# Altium PCB PCB2.PcbDoc
Units mil, origin at the board's own origin, x right, y up, seen from the top; angles counter-clockwise.
Board outline 6000 x 4000 mil, 2 copper layers (Top Layer, Bottom Layer); 96 components, 54 nets, 257 pads, 0 vias.
Unrouted connection lines stored in the file: 193.
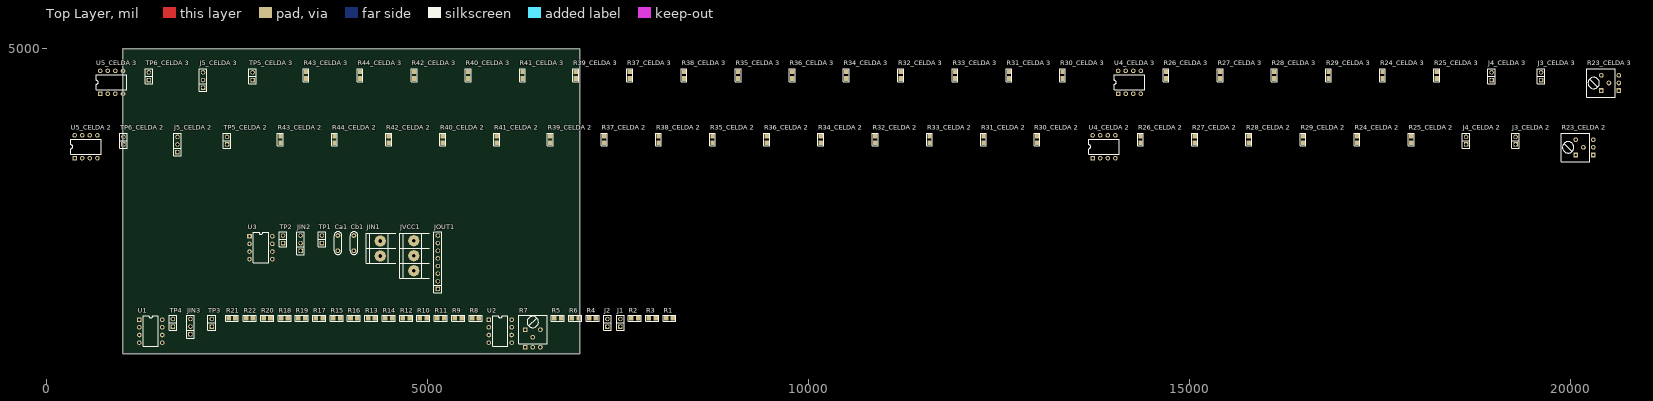
[diagram p0: Top Layer view]
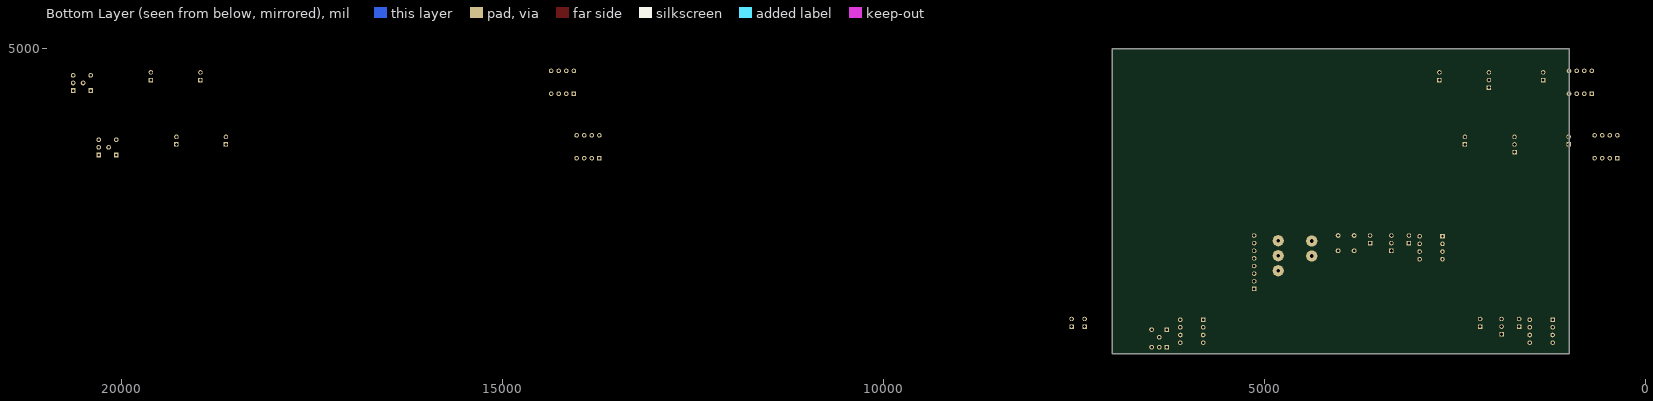
[diagram p1: Bottom Layer view, seen from below]

## Layer stack, top to bottom
Top Solder: solder mask 0.4, Solder Resist, Dk 3.5
Top Layer: signal copper 1.4
Dielectric 1: dielectric 12.6, FR-4, Dk 4.8
Bottom Layer: signal copper 1.4
Bottom Solder: solder mask 0.4, Solder Resist, Dk 3.5

## Board outline
1000,1000 7000,1000 7000,5000 1000,5000

## Design rules (kind name [scope] priority, off if disabled: settings)
Clearance [All] p1: gap=10 ignorepadtopadclearanceinfootprint=FALSE except(0: Arc-Hole Track-Hole SMDPad-Hole THPad-Hole Via-Hole Fill-Hole Poly-Hole Region-Hole Text-Hole)
PolygonConnect [All] p1: connectstyle=Relief reliefconductorwidth=10 reliefentries=4 polygonreliefangle="90 Angle" airgapwidth=10
RoomDefinition filter [InComponentClass('filter')] p1: confinementstyle=ConfineIn formatcopy=TRUE lockcomponents=FALSE outline 2625,1790 5370,1790 5370,2710 2625,2710
RoomDefinition "CELDA 3" [InComponentClass('CELDA 3')] p2: confinementstyle=ConfineIn formatcopy=TRUE lockcomponents=FALSE outline 635,4355 20875,4355 20875,4860 635,4860
RoomDefinition "CELDA 2" [InComponentClass('CELDA 2')] p3: confinementstyle=ConfineIn formatcopy=TRUE lockcomponents=FALSE outline 300,3510 20540,3510 20540,4015 300,4015
RoomDefinition "CELDA 1" [InComponentClass('CELDA 1')] p4: confinementstyle=ConfineIn formatcopy=TRUE lockcomponents=FALSE outline 1180,1045 8270,1045 8270,1615 1180,1615
RoutingVias [All] p1: holewidth=28 width=50 viastyle="Through Hole" minholewidth=28 minwidth=50 maxholewidth=28 maxwidth=50
SolderMaskExpansion [All] p1: expansion=4
Width [All] p1: maxlimit=10 minlimit=10 preferedwidth=10
30 further rules are at their usual default settings.

## Classes and differential pairs
channel class fleischerTowR3: "CELDA 2" "CELDA 3"
component class filter: Ca1 Cb1 JIN1 JIN2 JOUT1 JVCC1 TP1 TP2 U3
component class "CELDA 3": "J3_CELDA 3" "J4_CELDA 3" "J5_CELDA 3" "R23_CELDA 3" "R24_CELDA 3" "R25_CELDA 3" "R26_CELDA 3" "R27_CELDA 3" "R28_CELDA 3" "R29_CELDA 3" "R30_CELDA 3" "R31_CELDA 3" "R32_CELDA 3" "R33_CELDA 3" "R34_CELDA 3" "R35_CELDA 3" "R36_CELDA 3" "R37_CELDA 3" "R38_CELDA 3" "R39_CELDA 3" "R40_CELDA 3" "R41_CELDA 3" "R42_CELDA 3" "R43_CELDA 3" "R44_CELDA 3" "TP5_CELDA 3" "TP6_CELDA 3" "U4_CELDA 3" "U5_CELDA 3"
component class "CELDA 2": "J3_CELDA 2" "J4_CELDA 2" "J5_CELDA 2" "R23_CELDA 2" "R24_CELDA 2" "R25_CELDA 2" "R26_CELDA 2" "R27_CELDA 2" "R28_CELDA 2" "R29_CELDA 2" "R30_CELDA 2" "R31_CELDA 2" "R32_CELDA 2" "R33_CELDA 2" "R34_CELDA 2" "R35_CELDA 2" "R36_CELDA 2" "R37_CELDA 2" "R38_CELDA 2" "R39_CELDA 2" "R40_CELDA 2" "R41_CELDA 2" "R42_CELDA 2" "R43_CELDA 2" "R44_CELDA 2" "TP5_CELDA 2" "TP6_CELDA 2" "U4_CELDA 2" "U5_CELDA 2"
component class "CELDA 1": J1 J2 JIN3 R1 R2 R3 R4 R5 R6 R7 R8 R9 R10 R11 R12 R13 R14 R15 R16 R17 R18 R19 R20 R21 R22 TP3 TP4 U1 U2

## Components (designator, comment, footprint, x,y, rotation, side; value= is the part's Value field where it differs from the comment)
Ca1 "CAP" CAP200 3825,2450 r90 top
Cb1 "CAP" CAP200 4035,2450 r90 top
J1 "C2" SIP2 7530,1405 r90 top
J2 "C1" SIP2 7360,1405 r90 top
"J3_CELDA 2" "C2" SIP2 19275,3795 r90 top (schematic designator J3)
"J3_CELDA 3" "C2" SIP2 19610,4640 r90 top (schematic designator J3)
"J4_CELDA 2" "C1" SIP2 18625,3795 r90 top (schematic designator J4)
"J4_CELDA 3" "C1" SIP2 18960,4640 r90 top (schematic designator J4)
"J5_CELDA 2" "JUMPER" JUMPER3 1720,3745 r90 top (schematic designator J5)
"J5_CELDA 3" "JUMPER" JUMPER3 2055,4590 r90 top (schematic designator J5)
JIN1 "BORNERA 2" BORNERA2 4380,2380 r0 top
JIN2 "JUMPER" JUMPER3 3335,2450 r90 top
JIN3 "JUMPER" JUMPER3 1890,1355 r90 top
JOUT1 "CON8" SIP8 5135,1850 r90 top
JVCC1 "BORNERA 3" BORNERA3 4820,2285 r0 top
R1 "RES" 0805 8175,1465 r0 top
R2 "RES" 0805 7720,1465 r0 top
R3 "RES" 0805 7950,1465 r0 top
R4 "RES" 0805 7165,1465 r0 top
R5 "RES" 0805 6710,1465 r0 top
R6 "RES" 0805 6940,1465 r0 top
R7 "PRESET" "PRESET H" 6380,1315 r0 top
R8 "RES" 0805 5630,1465 r0 top
R9 "RES" 0805 5405,1465 r0 top
R10 "RES" 0805 4945,1465 r0 top
R11 "RES" 0805 5175,1465 r0 top
R12 "RES" 0805 4720,1465 r0 top
R13 "RES" 0805 4265,1465 r0 top
R14 "RES" 0805 4490,1465 r0 top
R15 "RES" 0805 3810,1465 r0 top
R16 "RES" 0805 4035,1465 r0 top
R17 "RES" 0805 3580,1465 r0 top
R18 "RES" 0805 3125,1465 r0 top
R19 "RES" 0805 3350,1465 r0 top
R20 "RES" 0805 2895,1465 r0 top
R21 "RES" 0805 2435,1465 r0 top
R22 "RES" 0805 2665,1465 r0 top
"R23_CELDA 2" "PRESET" "PRESET H" 20065,3705 r90 top (schematic designator R23)
"R23_CELDA 3" "PRESET" "PRESET H" 20400,4550 r90 top (schematic designator R23)
"R24_CELDA 2" "RES" 0805 17195,3810 r90 top (schematic designator R24)
"R24_CELDA 3" "RES" 0805 17530,4655 r90 top (schematic designator R24)
"R25_CELDA 2" "RES" 0805 17905,3810 r90 top (schematic designator R25)
"R25_CELDA 3" "RES" 0805 18240,4655 r90 top (schematic designator R25)
"R26_CELDA 2" "RES" 0805 14355,3810 r90 top (schematic designator R26)
"R26_CELDA 3" "RES" 0805 14690,4655 r90 top (schematic designator R26)
"R27_CELDA 2" "RES" 0805 15065,3810 r90 top (schematic designator R27)
"R27_CELDA 3" "RES" 0805 15400,4655 r90 top (schematic designator R27)
"R28_CELDA 2" "RES" 0805 15775,3810 r90 top (schematic designator R28)
"R28_CELDA 3" "RES" 0805 16110,4655 r90 top (schematic designator R28)
"R29_CELDA 2" "RES" 0805 16485,3810 r90 top (schematic designator R29)
"R29_CELDA 3" "RES" 0805 16820,4655 r90 top (schematic designator R29)
"R30_CELDA 2" "RES" 0805 12995,3810 r90 top (schematic designator R30)
"R30_CELDA 3" "RES" 0805 13330,4655 r90 top (schematic designator R30)
"R31_CELDA 2" "RES" 0805 12295,3810 r90 top (schematic designator R31)
"R31_CELDA 3" "RES" 0805 12630,4655 r90 top (schematic designator R31)
"R32_CELDA 2" "RES" 0805 10875,3810 r90 top (schematic designator R32)
"R32_CELDA 3" "RES" 0805 11210,4655 r90 top (schematic designator R32)
"R33_CELDA 2" "RES" 0805 11585,3810 r90 top (schematic designator R33)
"R33_CELDA 3" "RES" 0805 11920,4655 r90 top (schematic designator R33)
"R34_CELDA 2" "RES" 0805 10160,3810 r90 top (schematic designator R34)
"R34_CELDA 3" "RES" 0805 10495,4655 r90 top (schematic designator R34)
"R35_CELDA 2" "RES" 0805 8740,3810 r90 top (schematic designator R35)
"R35_CELDA 3" "RES" 0805 9075,4655 r90 top (schematic designator R35)
"R36_CELDA 2" "RES" 0805 9450,3810 r90 top (schematic designator R36)
"R36_CELDA 3" "RES" 0805 9785,4655 r90 top (schematic designator R36)
"R37_CELDA 2" "RES" 0805 7320,3810 r90 top (schematic designator R37)
"R37_CELDA 3" "RES" 0805 7655,4655 r90 top (schematic designator R37)
"R38_CELDA 2" "RES" 0805 8030,3810 r90 top (schematic designator R38)
"R38_CELDA 3" "RES" 0805 8365,4655 r90 top (schematic designator R38)
"R39_CELDA 2" "RES" 0805 6610,3810 r90 top (schematic designator R39)
"R39_CELDA 3" "RES" 0805 6945,4655 r90 top (schematic designator R39)
"R40_CELDA 2" "RES" 0805 5200,3810 r90 top (schematic designator R40)
"R40_CELDA 3" "RES" 0805 5535,4655 r90 top (schematic designator R40)
"R41_CELDA 2" "RES" 0805 5910,3810 r90 top (schematic designator R41)
"R41_CELDA 3" "RES" 0805 6245,4655 r90 top (schematic designator R41)
"R42_CELDA 2" "RES" 0805 4490,3810 r90 top (schematic designator R42)
"R42_CELDA 3" "RES" 0805 4825,4655 r90 top (schematic designator R42)
"R43_CELDA 2" "RES" 0805 3070,3810 r90 top (schematic designator R43)
"R43_CELDA 3" "RES" 0805 3405,4655 r90 top (schematic designator R43)
"R44_CELDA 2" "RES" 0805 3780,3810 r90 top (schematic designator R44)
"R44_CELDA 3" "RES" 0805 4115,4655 r90 top (schematic designator R44)
TP1 "JUMPER" JUMPER2 3615,2500 r90 top
TP2 "JUMPER" JUMPER2 3105,2500 r90 top
TP3 "JUMPER" JUMPER2 2170,1405 r90 top
TP4 "JUMPER" JUMPER2 1660,1405 r90 top
"TP5_CELDA 2" "JUMPER" JUMPER2 2370,3795 r90 top (schematic designator TP5)
"TP5_CELDA 3" "JUMPER" JUMPER2 2705,4640 r90 top (schematic designator TP5)
"TP6_CELDA 2" "JUMPER" JUMPER2 1010,3795 r90 top (schematic designator TP6)
"TP6_CELDA 3" "JUMPER" JUMPER2 1345,4640 r90 top (schematic designator TP6)
U1 "LM833" DIP8 1220,1445 r0 top
U2 "LM833" DIP8 5805,1445 r0 top
U3 "LM833" DIP8 2665,2540 r0 top
"U4_CELDA 2" "LM833" DIP8 13725,3565 r90 top (schematic designator U4)
"U4_CELDA 3" "LM833" DIP8 14060,4410 r90 top (schematic designator U4)
"U5_CELDA 2" "LM833" DIP8 370,3565 r90 top (schematic designator U5)
"U5_CELDA 3" "LM833" DIP8 705,4410 r90 top (schematic designator U5)

## Footprints (in the part's own frame and the unit in brackets; to place one, negate y for a bottom-side part, rotate by r counter-clockwise, add the part's x,y. Pads: shape width x height; smd on the part's side, far side on the other; paste and mask are expansions set on the pad)
0805 [mil] "Pasivo 0805"
  rect 60x56 smd: 1(-45,0) 2(45,0)
  silkscreen extent -85,-38 85,38, body extent -40,-24 39,25, height 15
BORNERA2 [mm] "Bornera con Tornillos 5mm separación"
  round 3.75 hole 1.3: 1(0,2.5) 2(0,-2.5)
  silkscreen extent -4.6,-5 5.2,5, body extent -3.76,-4.89 3.94,5.61, height 10
BORNERA3 [mm] "Bornera con Tornillos 5mm separación"
  round 3.75 hole 1.3: 1(0,5) 2(0,0) 3(0,-5)
  silkscreen extent -4.6,-7.5 5.2,7.5, body extent -3.76,-7.39 3.94,8.11, height 10.05
CAP200 [mil]
  round 62 hole 32: 1(-100,0) 2(100,0)
  silkscreen extent -150,-50 150,50, body extent -110,-46 110,44, height 246
DIP8 [mil]
  rect 60x60 hole 32: 1(0,0)
  round 60 hole 32: 2(0,-100) 3(0,-200) 4(0,-300) 5(300,-300) 6(300,-200) 7(300,-100) 8(300,0)
  silkscreen extent 50,-350 250,50, body extent -3,-363 303,63, height 177
JUMPER2 [mm]
  rect 1.5x1.5 hole 1.016: 1(-1.27,0)
  round 1.5 hole 1.016: 2(1.27,0)
  silkscreen extent -2.54,-1.27 2.54,1.27, body extent -2.46,-1.27 2.54,1.27, height 9.5
JUMPER3 [mm]
  rect 1.5x1.5 hole 1.016: 1(-2.54,0)
  round 1.5 hole 1.016: 2(0,0) 3(2.54,0)
  silkscreen extent -3.81,-1.27 3.81,1.27, body extent -3.81,-1.3 3.81,1.27, height 16.15
"PRESET H" [mil]
  rect 62x62 hole 32: 1(-98.43,-230) 1(-98.42,0)
  round 62 hole 32: 2(1.57,-230) 2(1.57,-100) 3(101.57,-230) 3(101.57,0)
  silkscreen extent -186,-185 189,190, body extent -190,-188 185,188, height 197
SIP2 [mm]
  rect 1.5x1.5 hole 1.016: 1(-1.27,0)
  round 1.5 hole 1.016: 2(1.27,0)
  silkscreen extent -2.54,-1.27 2.54,1.27
SIP8 [mm]
  rect 1.5x1.5 hole 1.016: 1(0,0)
  round 1.5 hole 1.016: 2(2.54,0) 3(5.08,0) 4(7.62,0) 5(10.16,0) 6(12.7,0) 7(15.24,0) 8(17.78,0)
  silkscreen extent -1.27,-1.27 19.05,1.27, body extent -1.27,-1.27 19.05,1.27, height 8.38

## Part data
J1 J2 "J3_CELDA 2" "J3_CELDA 3" "J4_CELDA 2" "J4_CELDA 3": library part CON2
"J5_CELDA 2" "J5_CELDA 3" JIN2 JIN3: library part JUMPER3
U1 U2 U3 "U4_CELDA 2" "U4_CELDA 3" "U5_CELDA 2" "U5_CELDA 3": "Dual Audio Operational Amplifier"

## Nets (pads, with @x,y where several pads share a name; then routed paths per layer and width w, separated by ;. In a path a pad name is that pad's centre, name@x,y a point inside that pad or via, vN(x,y) a via of type N, cw(c..) or ccw(c..) an arc to the next point about the centre after c; other vN are vias at no path point)
GND: "U4_CELDA 2.3" "U4_CELDA 2.5" "U4_CELDA 3.3" "U4_CELDA 3.5" "U5_CELDA 2.5" "U5_CELDA 3.5" Ca1.2 Cb1.2 JIN1.2 JOUT1.7 JOUT1.8 JVCC1.2 U1.5 U2.3 U2.5 U3.5
NetJ1_1: J1.1 R8.2 R11.2 R20.2 R22.2 U2.2
NetJ1_2: J1.2 R1.2 R3.2 U2.1
NetJ2_1: J2.1 R1.1 R2.1
NetJ2_2: J2.2 R7.3
"NetJ3_CELDA 2_1": "J3_CELDA 2.1" "R30_CELDA 2.2" "R33_CELDA 2.2" "R42_CELDA 2.2" "R44_CELDA 2.2" "U4_CELDA 2.2"
"NetJ3_CELDA 2_2": "J3_CELDA 2.2" "R23_CELDA 2.3" "U4_CELDA 2.1"
"NetJ3_CELDA 3_1": "J3_CELDA 3.1" "R30_CELDA 3.2" "R33_CELDA 3.2" "R42_CELDA 3.2" "R44_CELDA 3.2" "U4_CELDA 3.2"
"NetJ3_CELDA 3_2": "J3_CELDA 3.2" "R23_CELDA 3.3" "U4_CELDA 3.1"
"NetJ4_CELDA 2_1": "J4_CELDA 2.1" "R23_CELDA 2.2" "R24_CELDA 2.1" "R26_CELDA 2.1" "R34_CELDA 2.2" "R38_CELDA 2.2" "U5_CELDA 2.6"
"NetJ4_CELDA 2_2": "J4_CELDA 2.2" "R24_CELDA 2.2" "R27_CELDA 2.2"
"NetJ4_CELDA 3_1": "J4_CELDA 3.1" "R23_CELDA 3.2" "R24_CELDA 3.1" "R26_CELDA 3.1" "R34_CELDA 3.2" "R38_CELDA 3.2" "U5_CELDA 3.6"
"NetJ4_CELDA 3_2": "J4_CELDA 3.2" "R24_CELDA 3.2" "R27_CELDA 3.2"
"NetJ5_CELDA 2_1": "J5_CELDA 2.1" "TP6_CELDA 2.1" "TP6_CELDA 2.2" "U5_CELDA 2.1" "U5_CELDA 2.2"
"NetJ5_CELDA 3_1": "J5_CELDA 3.1" "TP6_CELDA 3.1" "TP6_CELDA 3.2" "U5_CELDA 3.1" "U5_CELDA 3.2"
NetJIN2_1: JIN2.1 TP2.1 TP2.2 U3.1 U3.2
NetJIN3_1: JIN3.1 TP4.1 TP4.2 U1.1 U1.2
NetR2_2: R2.2 R3.1
NetR4_1: R4.1 R5.1 R9.2 R14.2 R17.2 R19.2 U2.6
NetR5_2: R5.2 R6.1
NetR7_2: R7.2 R12.2 R16.2 U1.6
NetR9_1: R9.1 R13.1 U1.7
NetR10_2: R10.2 R11.1
NetR13_2: R13.2 R14.1
NetR15_2: R15.2 R16.1
NetR18_2: R18.2 R19.1
NetR21_2: R21.2 R22.1
"NetR25_CELDA 2_1": "R25_CELDA 2.1" "R28_CELDA 2.1" "R31_CELDA 2.2" "R36_CELDA 2.2" "R39_CELDA 2.2" "R41_CELDA 2.2" "U4_CELDA 2.6"
"NetR25_CELDA 3_1": "R25_CELDA 3.1" "R28_CELDA 3.1" "R31_CELDA 3.2" "R36_CELDA 3.2" "R39_CELDA 3.2" "R41_CELDA 3.2" "U4_CELDA 3.6"
"NetR26_CELDA 2_2": "R26_CELDA 2.2" "R27_CELDA 2.1"
"NetR26_CELDA 3_2": "R26_CELDA 3.2" "R27_CELDA 3.1"
"NetR28_CELDA 2_2": "R28_CELDA 2.2" "R29_CELDA 2.1"
"NetR28_CELDA 3_2": "R28_CELDA 3.2" "R29_CELDA 3.1"
"NetR31_CELDA 2_1": "R31_CELDA 2.1" "R35_CELDA 2.1" "U5_CELDA 2.7"
"NetR31_CELDA 3_1": "R31_CELDA 3.1" "R35_CELDA 3.1" "U5_CELDA 3.7"
"NetR32_CELDA 2_2": "R32_CELDA 2.2" "R33_CELDA 2.1"
"NetR32_CELDA 3_2": "R32_CELDA 3.2" "R33_CELDA 3.1"
"NetR35_CELDA 2_2": "R35_CELDA 2.2" "R36_CELDA 2.1"
"NetR35_CELDA 3_2": "R35_CELDA 3.2" "R36_CELDA 3.1"
"NetR37_CELDA 2_2": "R37_CELDA 2.2" "R38_CELDA 2.1"
"NetR37_CELDA 3_2": "R37_CELDA 3.2" "R38_CELDA 3.1"
"NetR40_CELDA 2_2": "R40_CELDA 2.2" "R41_CELDA 2.1"
"NetR40_CELDA 3_2": "R40_CELDA 3.2" "R41_CELDA 3.1"
"NetR43_CELDA 2_2": "R43_CELDA 2.2" "R44_CELDA 2.1"
"NetR43_CELDA 3_2": "R43_CELDA 3.2" "R44_CELDA 3.1"
NetU3_6: U3.6 U3.7
VCC: "U4_CELDA 2.8" "U4_CELDA 3.8" "U5_CELDA 2.8" "U5_CELDA 3.8" Ca1.1 JVCC1.1 U1.8 U2.8 U3.8
VEE: "U4_CELDA 2.4" "U4_CELDA 3.4" "U5_CELDA 2.4" "U5_CELDA 3.4" Cb1.1 JVCC1.3 U1.4 U2.4 U3.4
VIN: JIN1.1 JIN3.3 TP3.1 TP3.2 U1.3
VinFT: "J5_CELDA 2.2" "J5_CELDA 3.2" "R34_CELDA 2.1" "R34_CELDA 3.1" "R37_CELDA 2.1" "R37_CELDA 3.1" "R39_CELDA 2.1" "R39_CELDA 3.1" "R40_CELDA 2.1" "R40_CELDA 3.1" "R42_CELDA 2.1" "R42_CELDA 3.1" "R43_CELDA 2.1" "R43_CELDA 3.1" JIN3.2 R12.1 R15.1 R17.1 R18.1 R20.1 R21.1
Vo1: "J5_CELDA 2.3" "TP5_CELDA 2.1" "TP5_CELDA 2.2" "U5_CELDA 2.3" R4.2 R6.2 R8.1 R10.1 U2.7
Vo2: "J5_CELDA 3.3" "R25_CELDA 2.2" "R29_CELDA 2.2" "R30_CELDA 2.1" "R32_CELDA 2.1" "TP5_CELDA 3.1" "TP5_CELDA 3.2" "U4_CELDA 2.7" "U5_CELDA 3.3"
Vo3: "R25_CELDA 3.2" "R29_CELDA 3.2" "R30_CELDA 3.1" "R32_CELDA 3.1" "U4_CELDA 3.7" JIN2.3 TP1.1 TP1.2 U3.3
VOUT: JIN2.2 JOUT1.1 JOUT1.2
pads on no net: "R23_CELDA 2.1" "R23_CELDA 3.1" JOUT1.3 JOUT1.4 JOUT1.5 JOUT1.6 R7.1